# Altium PCB LED7SEG.PcbDoc
Units mil, origin at the board's own origin, x right, y up, seen from the top; angles counter-clockwise.
Board outline 820 x 2400 mil, 2 copper layers (Top Layer, Bottom Layer); 22 components, 49 nets, 110 pads, 29 vias.
Unrouted connection lines stored in the file: 3.
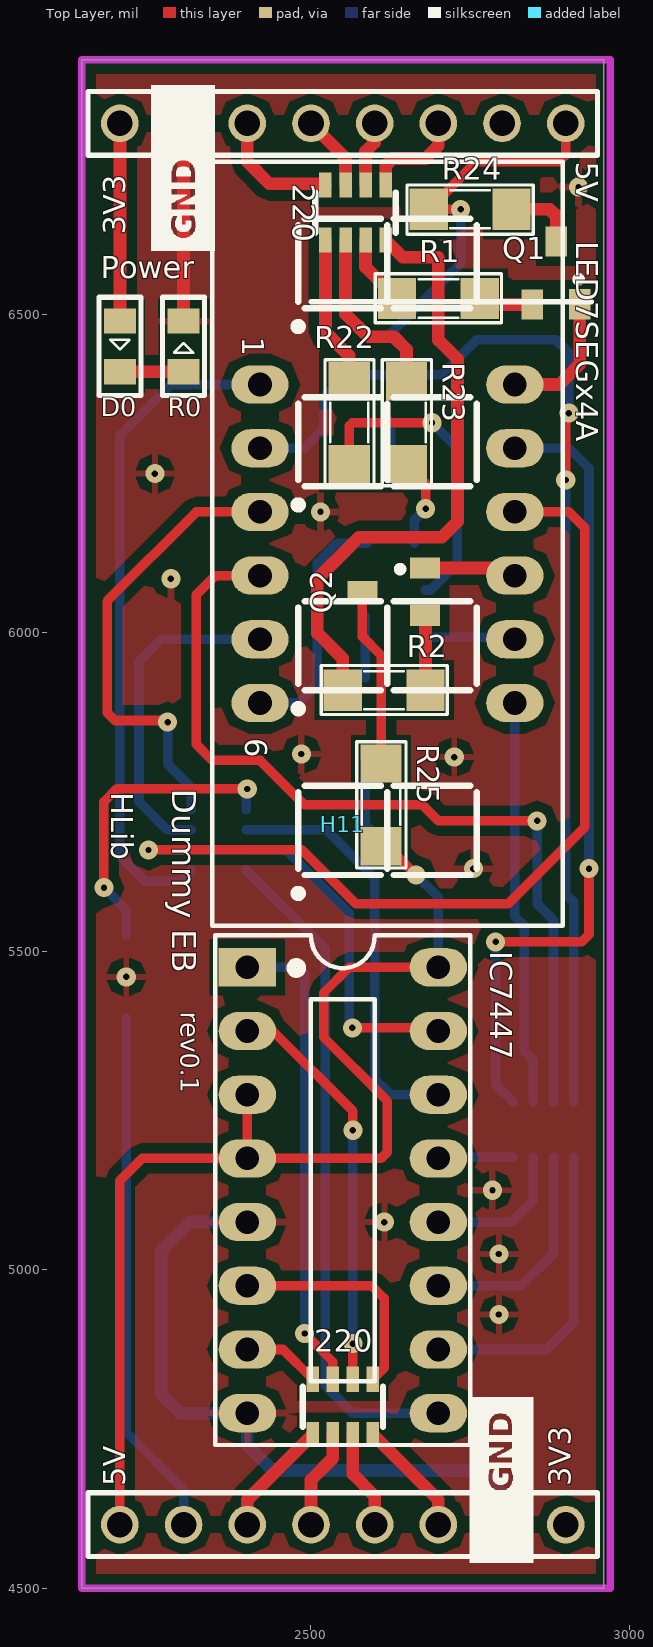
[diagram p0: Top Layer view]
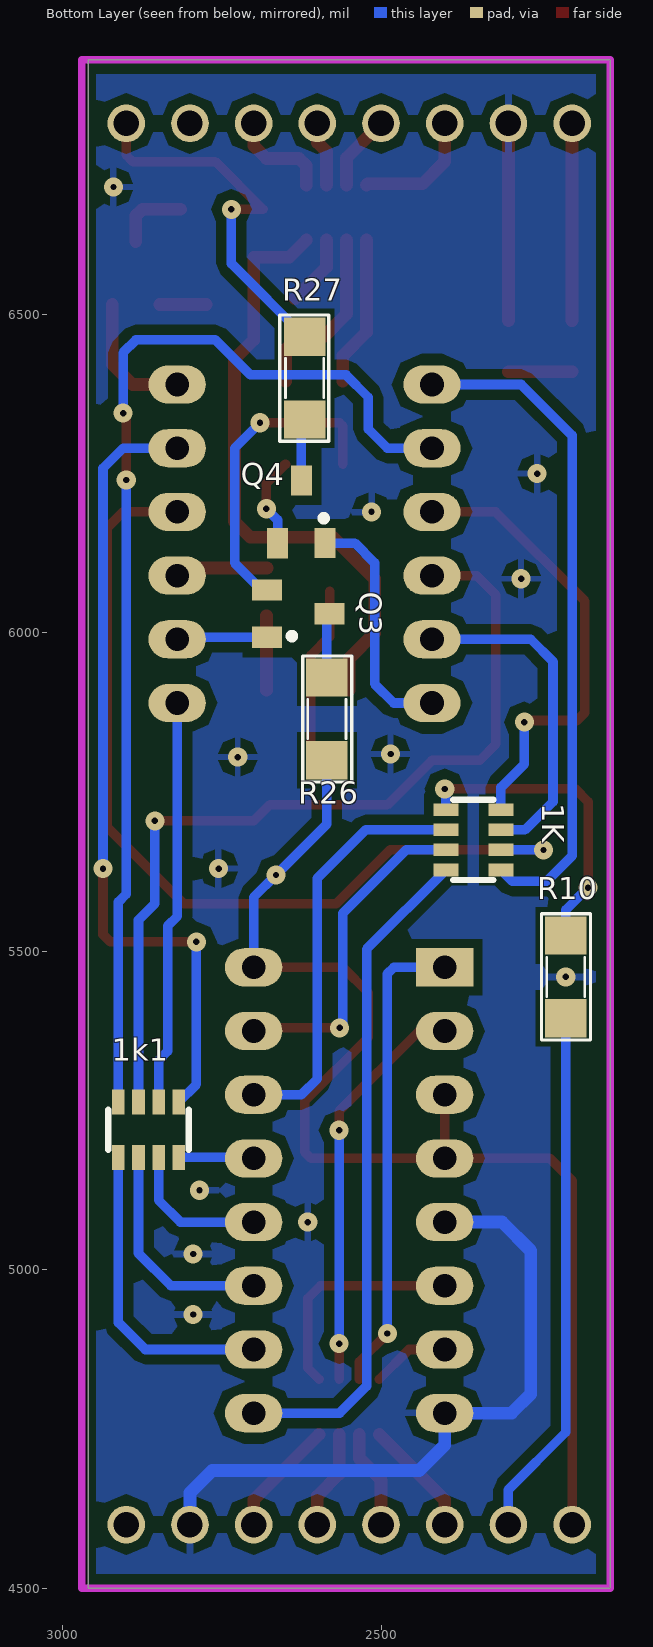
[diagram p1: Bottom Layer view, seen from below]
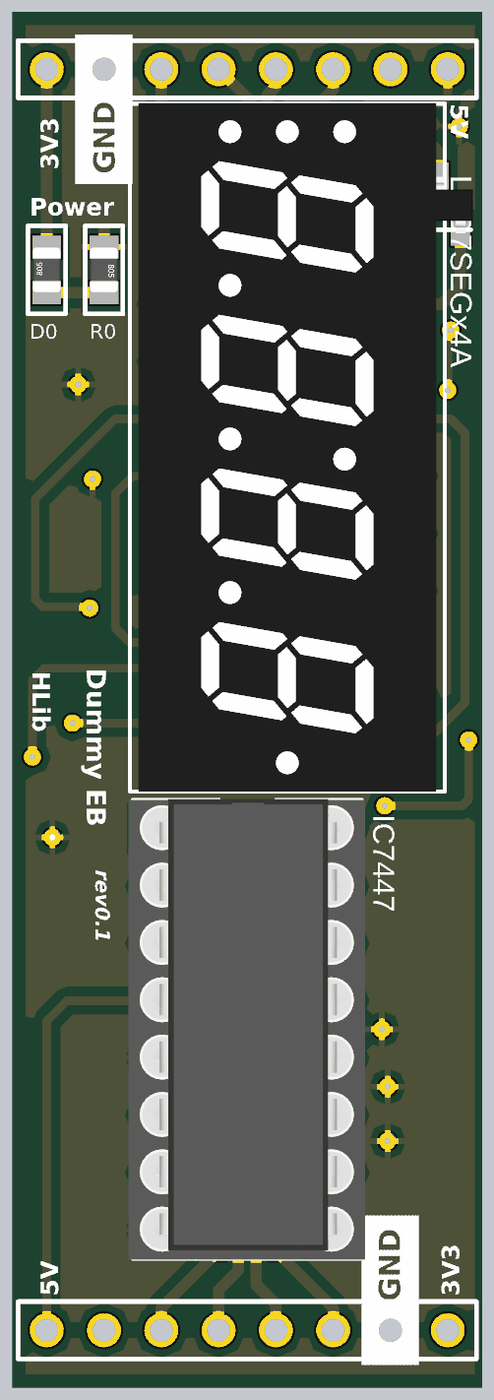
[diagram p2: 3D render of the assembled board from above, using the file's embedded part models]
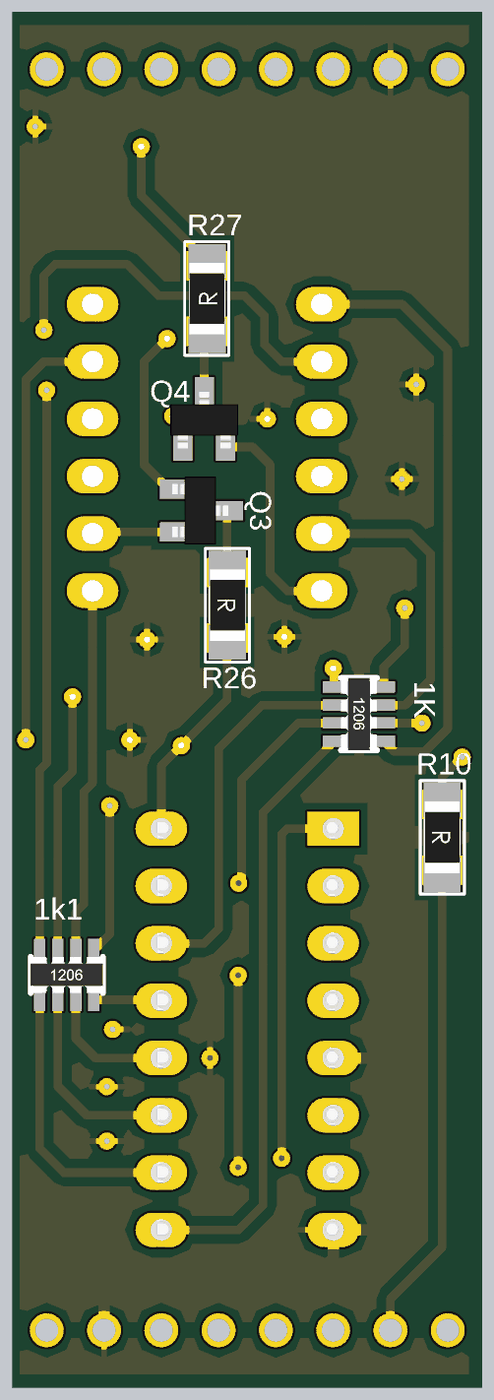
[diagram p3: 3D render of the assembled board from below, using the file's embedded part models]

## Layer stack, top to bottom
Top Layer: signal copper 1.4
Dielectric: dielectric 12.6, FR-4, Dk 4.8
Bottom Layer: signal copper 1.4

## Board outline
2140,4500 2140,6900 2960,6900 2960,4500

## Design rules (kind name [scope] priority, off if disabled: settings)
Clearance [InPolygon] p1: gap=15
Clearance Clearance_1 [All] p2: gap=10
PolygonConnect [All] p1: connectstyle=Relief reliefconductorwidth=10 reliefentries=4 polygonreliefangle="90 Angle"
RoutingVias [All] p1: holewidth=25 width=40 viastyle="Through Hole" minholewidth=28 minwidth=50 maxholewidth=28 maxwidth=50
SilkscreenOverComponentPads SilkToSolderMaskClearance [IsPad] p1: minsilkscreentomaskgap=10
SolderMaskExpansion [All] p1: expansion=4
Width [All] p1: maxlimit=25 minlimit=8 preferedwidth=10
27 further rules are at their usual default settings.

## Components (designator, comment, footprint, x,y, rotation, side; value= is the part's Value field where it differs from the comment)
1K "RA4" RA4 2355,5675 r270 bottom
1k1 "RA4" RA4 2865,5220 r180 bottom
220 "RA4" RA4 2550,4785 r180 top
220 "RA4" RA4 2570,6660 r180 top (schematic designator 200)
D0 "Power" SMD0805 2200,6450 r270 top
H11 "MBoard1_BH_DualPorts" MBoard1_BH_DualPorts 2200,6800 r0 top
IC7447 "7447" DIP16/W0.3 2400,5475 r270 top
LED7SEGx4A "LED7SEGx4A" LED7SEGx4A 2420,6390 r270 top
Q1 "C1815" SOT23B 2885,6565 r0 top
Q2 "C1815" SOT23B 2630,6065 r90 top
Q3 "C1815" SOT23B 2630,6030 r270 bottom
Q4 "C1815" SOT23B 2625,6190 r180 bottom
R0 "R" SMD0805 2300,6450 r90 top
R1 "4K7" SM-1206 2700,6525 r0 top
R2 "4K7" SM-1206 2615,5910 r0 top
R10 "220" SM-1206 2210,5460 r270 bottom
R22 "4K7" SM-1206 2560,6330 r270 top
R23 "4K7" SM-1206 2650,6330 r270 top
R24 "1k" SM-1206 2750,6665 r180 top
R25 "1k" SM-1206 2610,5730 r270 top
R26 "1k" SM-1206 2585,5865 r270 bottom
R27 "1k" SM-1206 2620,6400 r90 bottom

## Footprints (in the part's own frame and the unit in brackets; to place one, negate y for a bottom-side part, rotate by r counter-clockwise, add the part's x,y. Pads: shape width x height; smd on the part's side, far side on the other; paste and mask are expansions set on the pad)
DIP16/W0.3 [mil] "16 PIN, W 300mil, Pin to pin 100mil"
  rect 60x90 hole 37: 1(0,0)
  oval 60x90 hole 37: 2(100,0) 3(200,0) 4(300,0) 5(400,0) 6(500,0) 7(600,0) 8(700,0) 9(700,300) 10(600,300) 11(500,300) 12(400,300) 13(300,300) 14(200,300) 15(100,300) 16(0,300)
  silkscreen extent -50,-50 750,350, body extent -52,-57 752,356, height 299
LED7SEGx4A [mil] "DIP 12 Leads; Body 32x 15 mm; Pitch 0.5 mm"
  oval 60x90 hole 37: 1(0,0) 2(100,0) 3(200,0) 4(300,0) 5(400,0) 6(500,0) 7(500,400) 8(400,400) 9(300,400) 10(200,400) 11(100,400) 12(0,400)
  silkscreen extent -350,-75 850,475, body extent -351,-60 850,460, height 532
MBoard1_BH_DualPorts [mm]
  round 1.5 hole 1.02: 1(0,0) 2(2.54,0) 3(5.08,0) 4(7.62,0) 5(10.16,0) 6(12.7,0) 7(15.24,0) 8(17.78,0) 9(17.78,-55.88) 10(15.24,-55.88) 11(12.7,-55.88) 12(10.16,-55.88) 13(7.62,-55.88) 14(5.08,-55.88) 15(2.54,-55.88) 16(0,-55.88)
  silkscreen extent -1.27,-57.15 19.05,1.27, body extent -1.27,-57.15 19.05,1.27, height 8
RA4 [mm] "Resistor Array (0603x4) form TME"
  rect 0.5x1 smd: 1(-1.2,-1.1) 2(-1.2,1.1) 3(-0.4,-1.1) 4(-0.4,1.1) 5(0.4,-1.1) 6(0.4,1.1) 7(1.2,-1.1) 8(1.2,1.1)
  silkscreen extent -1.6,-0.8 1.6,0.8, body extent -1.6,-0.8 1.6,0.8, height 0.5
SM-1206 [mil] "Compoment SMD 120x60mil"
  rect 60x65 smd: 1(-65,0) 2(65,0)
  silkscreen extent -99,-38 99,39, body extent -83,-35 83,36, height 25
SMD0805 [mil] "Chip Resistor; Body 2.0 x 1.3 mm (LxW typ)"
  rect 39.37x50 smd: 1(-40,0) 2(40,0)
  silkscreen extent -77,-33 77,33, body extent -39,-25 39,25, height 31
SOT23B [mm] "SOT 23B"
  rect 0.85x1.2 smd: 1(0.94,-1.245) 2(0,1.25) 3(-0.95,-1.25)
  silkscreen extent 0.77,-0.38 1.02,-0.13, body extent -1.5,-1.3 1.5,1.2, height 1.06

## Part data
D0: library part LEDSMD, "LED 3mm"
IC7447: "BCD to 7-Segment Decoder/Driver"
LED7SEGx4A: "0.36''"
Q1 Q2 Q3 Q4: "NPN 600mW, ECB"
R0: "RES_08"
R1 R2 R10 R22 R23 R24 R25 R26 R27: library part R, "Resistor 1/4W"

## Via types
v1: diameter 30, hole 10, Top Layer to Bottom Layer, 29 vias

## Nets (pads, with @x,y where several pads share a name; then routed paths per layer and width w, separated by ;. In a path a pad name is that pad's centre, name@x,y a point inside that pad or via, vN(x,y) a via of type N, cw(c..) or ccw(c..) an arc to the next point about the centre after c; other vN are vias at no path point)
3V3: D0.1 H11.1 H11.9 | length 310
  Top Layer w20: D0.1 H11.1
5V: H11.8 H11.16 IC7447.3 IC7447.4 IC7447.16 R24.2 R25.2 R26.2 R27.2 | length 2600.7
  Top Layer w15: H11.16 2200,5140 2235,5175 IC7447.4 ; IC7447.3 IC7447.4 ; R25.2@2620,5665 v1(2665,5620) ; IC7447.16 2560,5475 2520,5435 2520,5365 2620,5265 2620,5185 2610,5175 IC7447.4 ; v1(2735,6665) R24.2 2760,6740 2890,6740 2900,6750 H11.8
  Bottom Layer w15: R26.2 2585,5700 v1(2665,5620) 2700,5585 IC7447.16 ; R27.2 2735,6580 v1(2735,6665)
GND: H11.2 H11.10 IC7447.5 IC7447.8 R0.2 | length 1367.1
  Top Layer w20: R0.2 H11.2
  Bottom Layer w20: IC7447.5 2310,5075 2265,5030 2265,4805 2295,4775 IC7447.8 2400,4725 2440,4685 2765,4685 2800,4650 H11.10
  other v1: 2795,4930 2795,5025 2615,5075 2785,5125 2210,5460 2755,5630 2725,5805 2485,5810 2280,6085 2515,6190 2255,6250 2920,6700
Net1k1_1: 1k1.1 IC7447.10 | length 489.2
  Bottom Layer w15: IC7447.10 2870,4875 2912.24,4917.24 1k1.1
Net1k1_2: 1k1.2 LED7SEGx4A.2 | length 1776.8
  Top Layer w15: v1(2900,6240) 2900,6340 v1(2905,6345)
  Bottom Layer w15: LED7SEGx4A.2 2490,6290 2520,6320 2520,6370 2555,6405 2705,6405 2760,6460 2885,6460 2905,6440 v1(2905,6345) ; v1(2900,6240) 2900,5590 2912.24,5577.76 1k1.2
Net1k1_3: 1k1.3 IC7447.11 | length 352.7
  Bottom Layer w15: IC7447.11 2830,4975 2880.75,5025.75 1k1.3
Net1k1_4: 1k1.4 LED7SEGx4A.4 | length 1384.5
  Top Layer w15: LED7SEGx4A.4 2350,6090 2320,6060 2320,5825 2345,5800 2420,5800 2490,5730 2675,5730 2700,5705 v1(2855,5705)
  Bottom Layer w15: v1(2855,5705) 2855,5575 2880.75,5549.25 1k1.4
Net1k1_5: 1k1.5 IC7447.12 | length 230.9
  Bottom Layer w15: IC7447.12 2815,5075 2849.25,5109.25 1k1.5
Net1k1_6: 1k1.6 LED7SEGx4A.7 | length 638.8
  Bottom Layer w15: LED7SEGx4A.7 2820,5555 2835,5540 2835,5343.17 2849.25,5328.92 1k1.6
Net1k1_7: 1k1.7 IC7447.13 | length 118.5
  Bottom Layer w15: IC7447.13 2701.69,5176.69 1k1.7
Net1k1_8: 1k1.8 LED7SEGx4A.11 | length 1276
  Top Layer w15: v1(2790,5515) 2925,5515 2936.5,5526.5 v1(2936.5,5630)
  Bottom Layer w15: v1(2790,5515) 2790,5291.06 1k1.8 ; LED7SEGx4A.11 2905,6290 2936.5,6258.5 v1(2936.5,5630)
Net1K_1: 1K.1 R10.1 | length 490.5
  Top Layer w15: v1(2175,5600) 2175,5735 2195,5755 v1(2400,5755)
  Bottom Layer w15: v1(2175,5600) 2210,5565 R10.1 ; 1K.1 v1@2398.31,5755
Net1K_2: 1K.2 LED7SEGx4A.3 | length 713.6
  Top Layer w15: v1@2272.5,5862.5 2192.5,5862.5 2180,5875 2180,6050 2320,6190 LED7SEGx4A.3
  Bottom Layer w15: v1@2275,5850 2275,5794.2 2311.69,5757.51 1K.2
  other v1: 2275,5860
Net1K_3: 1K.3 IC7447.14 | length 658.4
  Bottom Layer w15: 1K.3 2524.25,5690.75 2600,5615 2600,5300 2625,5275 IC7447.14
Net1K_4: 1K.4 LED7SEGx4A.5 | length 524.5
  Bottom Layer w15: 1K.4 2274.25,5690.75 2230,5735 2230,5955 2265,5990 LED7SEGx4A.5
Net1K_5: 1K.5 IC7447.15 | length 519.9
  Top Layer w15: v1@2570,5380 IC7447.15@2695,5380
  Bottom Layer w15: 1K.5 2460.75,5659.25 2560,5560 2560,5375 v1(2565,5380)
Net1K_6: 1K.6 LED7SEGx4A.10 | length 1426.7
  Top Layer w15: v1(2245,5659.25) 2485.75,5659.25 2570,5575 2810,5575 2930,5695 2930,6165 2905,6190 LED7SEGx4A.10
  Bottom Layer w15: v1(2245,5659.25) 1K.6
Net1K_7: 1K.7 IC7447.9 | length 1056.8
  Bottom Layer w15: 1K.7 2522.5,5503.56 2522.5,4817.5 2565,4775 IC7447.9
Net1K_8: 1K.8 LED7SEGx4A.1 | length 1048.8
  Bottom Layer w15: 1K.8 2293.94,5610 2240,5610 2200,5650 2200,6310 2280,6390 LED7SEGx4A.1
Net200_1: 220.1@2617.24,6703.31 H11.6 | length 161
  Top Layer w20: 220.1@2617.24,6703.31 2617.24,6733.5 2628.74,6745 2680,6745 2700,6765 H11.6
Net200_2: 220.2@2617.24,6616.69 R2.1 | length 970.1
  Top Layer w20: R2.1 2550,5960 2510,6000 2510,6085 2575,6150 2705,6150 2730,6175 2730,6430 2700,6460 2700,6590 2643.94,6590 220.2@2617.24,6616.69
Net200_3: 220.3@2585.75,6703.31 H11.5 | length 102.6
  Top Layer w20: 220.3@2585.75,6703.31 2585.75,6755.75 2600,6770 H11.5
Net200_4: 220.4@2585.75,6616.69 R1.1 | length 112.1
  Top Layer w20: 220.4@2585.75,6616.69 2585.75,6574.25 R1.1
Net200_5: 220.5@2554.25,6703.31 H11.4 | length 119.2
  Top Layer w20: H11.4 2554.25,6745.75 220.5@2554.25,6703.31
Net200_6: 220.6@2554.25,6616.69 R23.1 | length 284.8
  Top Layer w20: 220.6@2554.25,6616.69 2554.25,6500.75 2590,6465 2630,6465 2650,6445 R23.1
Net200_7: 220.7@2522.76,6703.31 H11.3 | length 198
  Top Layer w20: H11.3 2400,6740 2435,6705 2521.06,6705 220.7@2522.76,6703.31
Net200_8: 220.8@2522.76,6616.69 R22.1 | length 237.1
  Top Layer w20: 220.8@2522.76,6616.69 2522.76,6472.24 2560,6435 R22.1
Net220_1: 220.1@2597.24,4828.31 IC7447.6 | length 357.3
  Top Layer w15: IC7447.6 2595,4975 2615,4955 2615,4846.06 220.1@2597.24,4828.31
Net220_2: 220.2@2597.24,4741.69 H11.11 | length 184.3
  Top Layer w20: 220.2@2597.24,4741.69 2700,4638.94 H11.11
Net220_3: 220.3@2565.75,4828.31 IC7447.2 | length 638.8
  Top Layer w15: IC7447.2 2440,5375 2565.75,5249.25 v1(2565.75,5219.25) ; 220.3@2565.75,4828.31 v1(2565.75,4884.25)
  Bottom Layer w15: v1(2565.75,4884.25) v1(2565.75,5219.25)
Net220_4: 220.4@2565.75,4741.69 H11.12 | length 155.9
  Top Layer w20: 220.4@2565.75,4741.69 2565.75,4679.25 2600,4645 H11.12
Net220_5: 220.5@2534.25,4828.31 IC7447.1 | length 749.2
  Top Layer w15: v1(2490,4900) 2534.25,4855.75 220.5@2534.25,4828.31
  Bottom Layer w15: IC7447.1 2480,5475 2490,5465 v1(2490,4900)
Net220_6: 220.6@2534.25,4741.69 H11.13 | length 155.9
  Top Layer w20: H11.13 2500,4670 2534.25,4704.25 220.6@2534.25,4741.69
Net220_7: 220.7@2502.76,4828.31 IC7447.7 | length 122.1
  Top Layer w15: IC7447.7 2456.06,4875 220.7@2502.76,4828.31
Net220_8: 220.8@2502.76,4741.69 H11.14 | length 184.3
  Top Layer w20: H11.14 2400,4638.94 220.8@2502.76,4741.69
NetD0_2: D0.2 R0.1 | length 100
  Top Layer w20: D0.2 R0.1
NetH11_15: H11.15 R10.2 | length 832.3
  Bottom Layer w15: R10.2 2210,4745 2300,4655 H11.15
NetLED7SEGx4A_6: LED7SEGx4A.6 Q4.1 | length 383.3
  Bottom Layer w15: LED7SEGx4A.6 2480,5890 2510,5920 2510,6110 2541,6141 Q4.1
NetLED7SEGx4A_8: LED7SEGx4A.8 Q3.1 | length 142.2
  Bottom Layer w15: Q3.1 2817,5993 LED7SEGx4A.8
NetLED7SEGx4A_9: LED7SEGx4A.9 Q2.1 | length 146
  Top Layer w20: Q2.1 2808,6102 LED7SEGx4A.9
NetLED7SEGx4A_12: LED7SEGx4A.12 Q1.1 | length 209.3
  Top Layer w20: LED7SEGx4A.12 2890,6390 2922,6422 Q1.1
NetQ1_2: Q1.2 R24.1 | length 114.9
  Top Layer w20: R24.1 2875,6665 2885,6655 Q1.2
NetQ1_3: Q1.3 R1.2 | length 73.4
  Top Layer w20: R1.2@2774.21,6515.79 Q1.3
NetQ2_2: Q2.2 R25.1 | length 282.1
  Top Layer w15: Q2.2 2580.79,5994.21 2610,5965 R25.1
NetQ2_3: Q2.3 R2.2 | length 116.8
  Top Layer w20: R2.2 Q2.3@2680,6026.81
NetQ3_2: Q3.2 R26.1 | length 95.8
  Bottom Layer w15: R26.1 Q3.2@2585,6025.79
NetQ3_3: Q3.3 R22.2 | length 497.1
  Top Layer w15: R22.2 2560,6325 2565,6330 v1(2690,6330)
  Bottom Layer w15: Q3.3 2687.4,6067.4 2730,6110 2730,6290 v1(2690,6330)
NetQ4_2: Q4.2 R27.1 | length 97.9
  Bottom Layer w15: R27.1 2625,6330 Q4.2
NetQ4_3: Q4.3 R23.2 | length 143.9
  Top Layer w15: R23.2 2680,6235 v1(2680,6195)
  Bottom Layer w15: Q4.3 2662.4,6177.4 v1(2680,6195)
pads on no net: H11.7

## Polygon pours and split planes (outlines as drawn)
GND on Bottom Layer "Bottom Layer-No Net" (solid, remove dead copper, pour order 2): 2140,6900 2140,4500 2970,4500 2970,6900
GND on Top Layer "Bottom Layer-No Net" (solid, remove dead copper, pour order 4): 2140,6900 2140,4500 2970,4500 2970,6900

## Keep-outs
Keep-Out Layer:
  lines w12: 2140,4500 2140,6900 2970,6900 2970,4500 2140,4500

## Silkscreen, mask and mechanical layers (free items; w line width, h text height)
Top Overlay:
  drawing of 607 lines, arcs and shapes, not listed
  text "5V" at 2905,6740 h60 r270
  text "3V3" at 2220,6625 h60 r90
  text "Power" at 2170,6545 h60
  text "Dummy EB" at 2270,5755 h65 r270
  text "HLib" at 2175,5750 h60 r270
  text "rev0.1" at 2285,5405 h50 r270
  text "5V" at 2220,4660 h60 r90
  text "3V3" at 2920,4660 h60 r90
Drill Drawing:
  text ".LEGEND" at 7200,3200 h60
  text "Drill Drawing." at 7200,3100 h60

## Dimensions
2140,4500 to 2140,6900 on Mechanical 1
2140,4500 to 2970,4500 on Mechanical 1

## Text inside footprints (layer, text, board x,y; h text height)
LED7SEGx4A: Top Overlay "1" at 2380,6465 h60 r270; Top Overlay "6" at 2385,5835 h60 r270